# Altium PCB LineSensor32.PcbDoc (part 2 of 2)
Units mm, origin at the board's own origin, x right, y up, seen from the top; angles counter-clockwise.
Board outline 121.58 x 114.54 mm, 2 copper layers (Top Layer, Bottom Layer); 201 components, 111 nets, 642 pads, 221 vias.
Unrouted connection lines stored in the file: 4.
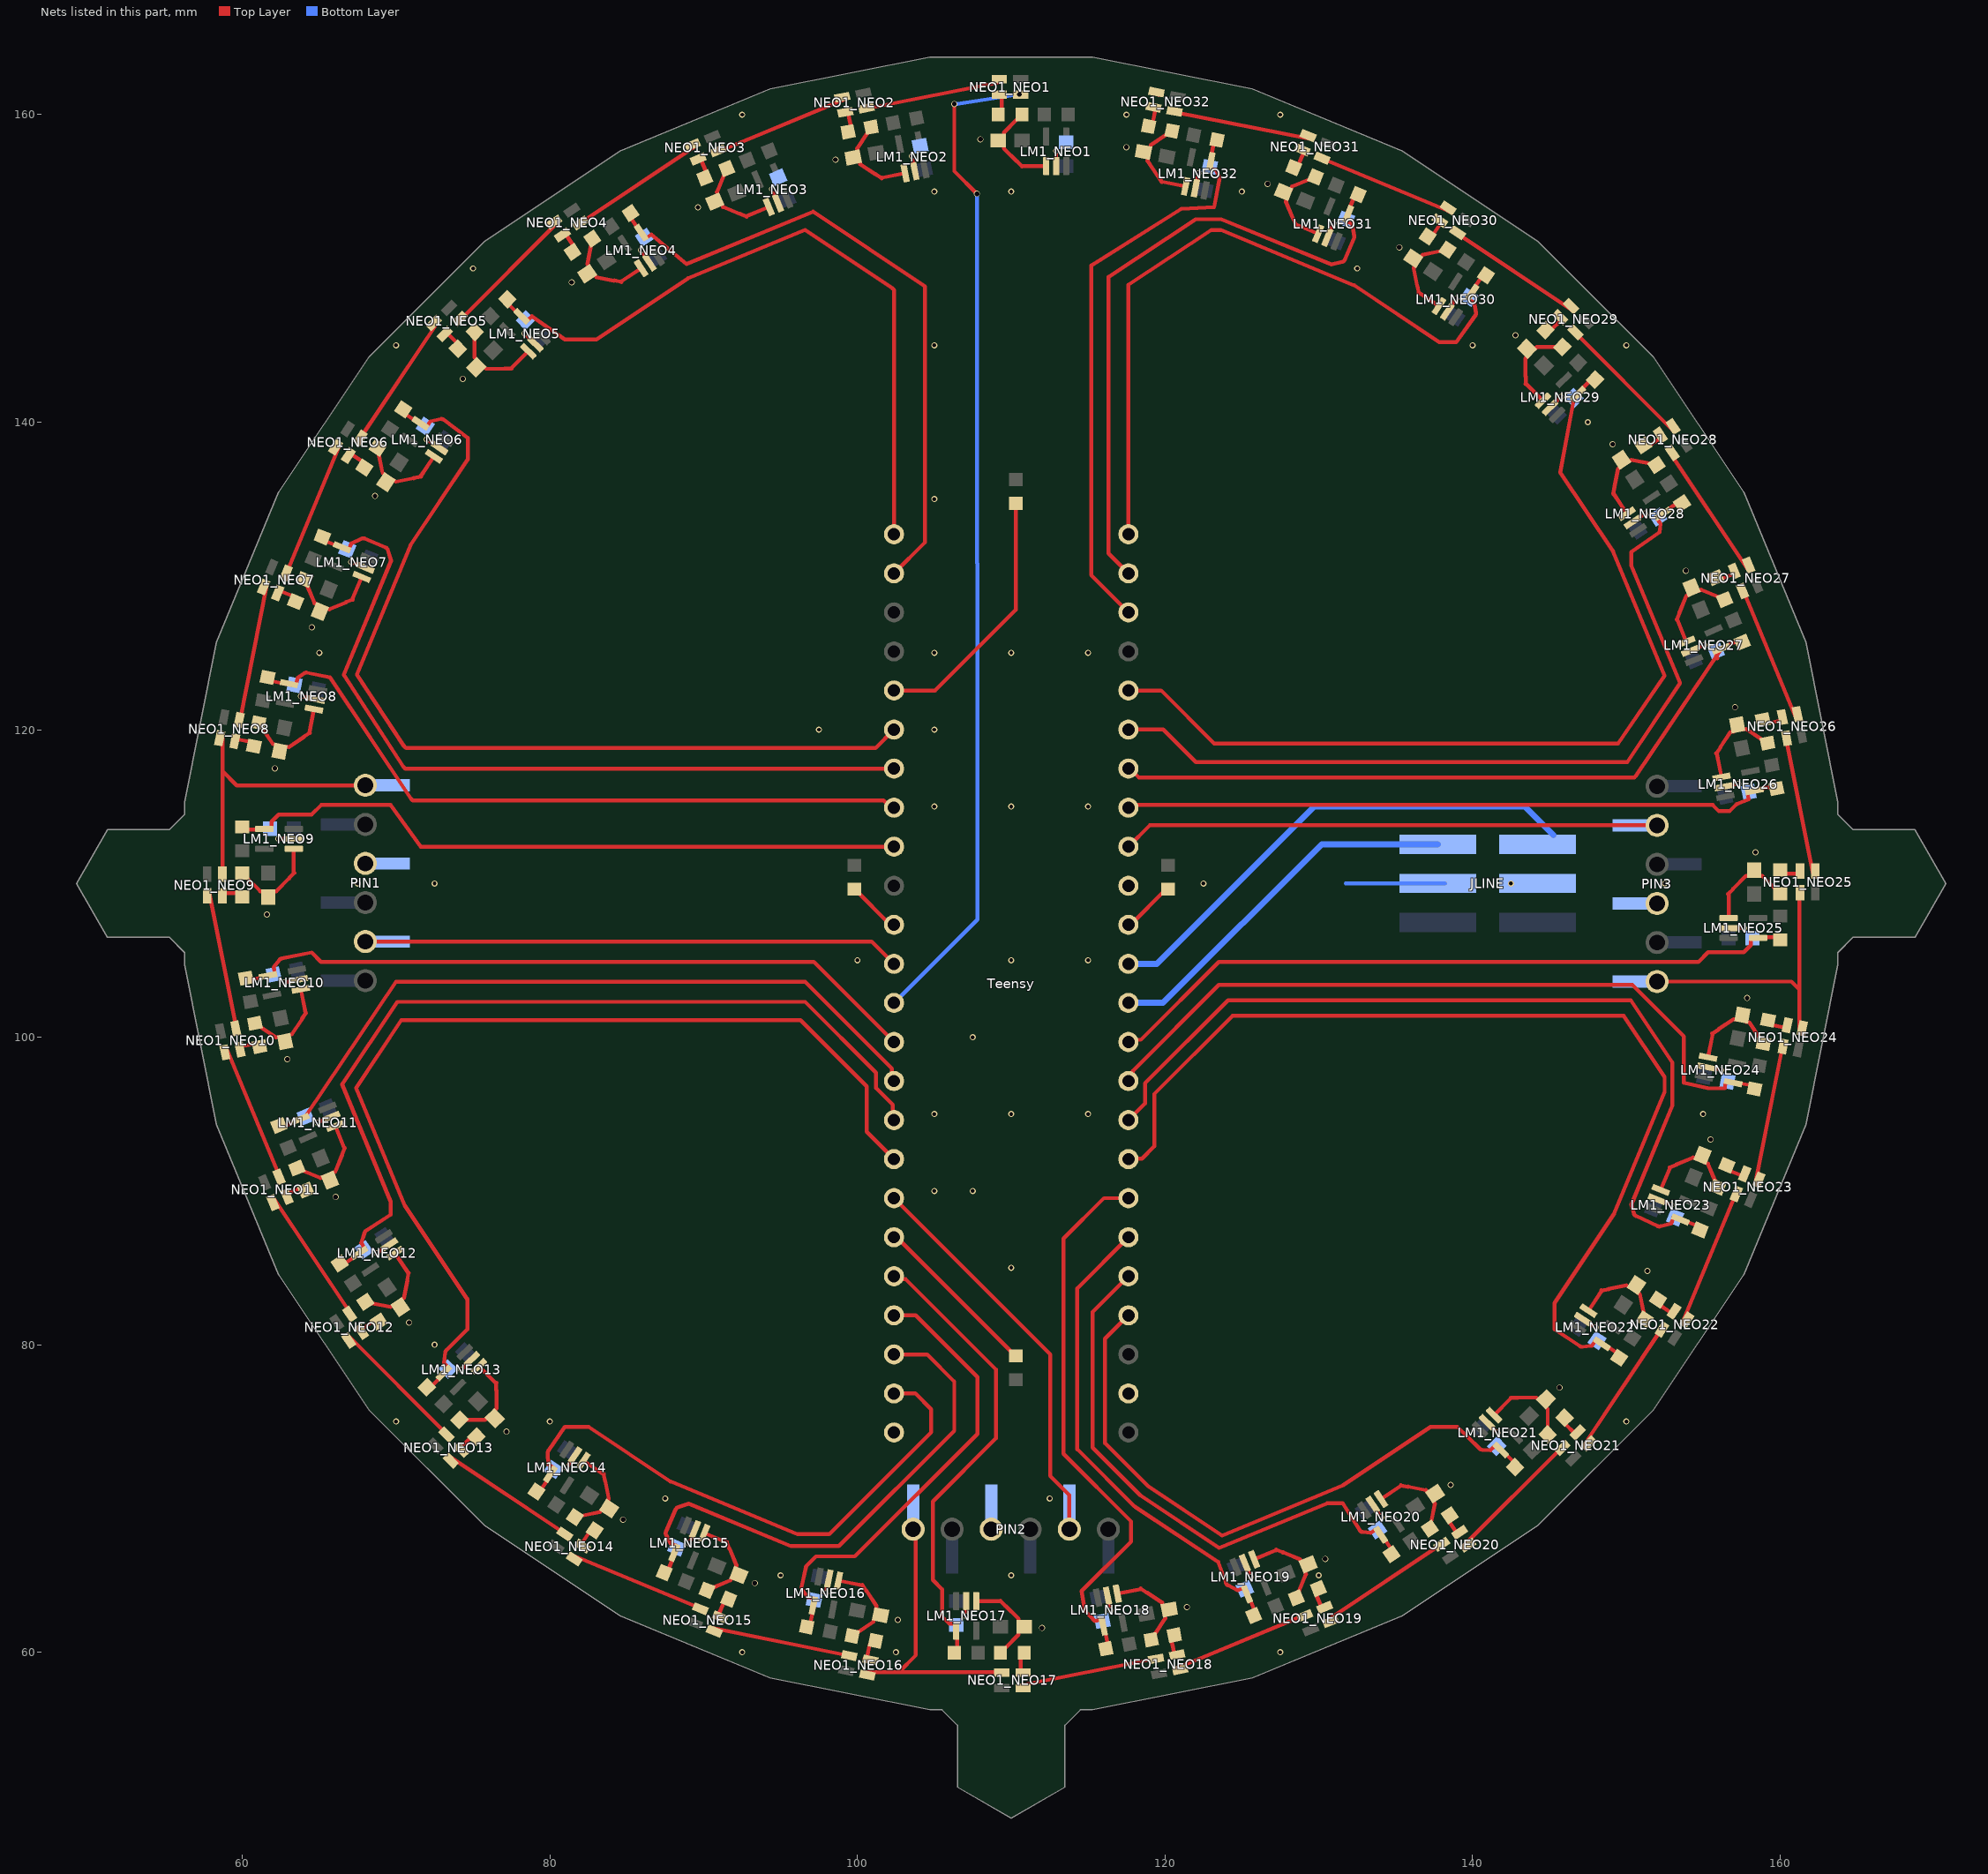
[diagram p2: the nets of this part, all layers, seen from the top]

## Via types
v1: diameter 0.4, hole 0.3, Top Layer to Bottom Layer, tented both sides, 167 vias
v2: diameter 0.4, hole 0.254, Top Layer to Bottom Layer, tented both sides, 51 vias
v3: diameter 6, hole 3, Top Layer to Bottom Layer, 3 vias

## Nets (pads, with @x,y where several pads share a name; then routed paths per layer and width w, separated by ;. In a path a pad name is that pad's centre, name@x,y a point inside that pad or via, vN(x,y) a via of type N, cw(c..) or ccw(c..) an arc to the next point about the centre after c; other vN are vias at no path point) (continued)
COMP4: LM1_NEO4.4 R2_NEO4.1 Teensy.31 | length 42.6
  Top Layer w0.254: R2_NEO4.1@85.251,153.6 85.203,153.357 85.878,152.347 86.098,152.019 86.268,151.985 86.597,152.204 88.895,150.29 97.117,153.695 104.4,148.829 104.4,132.19 Teensy.31@102.38,130.17
COMP5: LM1_NEO5.4 R2_NEO5.1 Teensy.32 | length 45.4
  Top Layer w0.254: R2_NEO5.1@77.229,147.997 77.229,147.75 78.088,146.891 78.368,146.611 78.542,146.611 78.821,146.891 80.988,145.37 83.011,145.37 88.983,149.36 96.588,152.511 102.267,148.716 102.38,148.603 Teensy.32@102.38,132.71
COMP6: LM1_NEO6.4 R2_NEO6.1 Teensy.27 | length 60.5
  Top Layer w0.254: R2_NEO6.1@70.455,140.833 70.503,140.59 71.514,139.915 71.842,139.695 72.013,139.729 72.232,140.058 72.887,140.2 cw(c72.941,139.952) 73.092,140.156 74.654,138.988 74.654,137.568 70.942,132.012 67.447,123.576 70.525,118.914 ; 70.525,118.913 ccw(c70.737,119.054) 70.737,118.8 101.17,118.8 Teensy.27@102.38,120.01
COMP7: LM1_NEO7.4 R2_NEO7.1 Teensy.26 | length 52.9
  Top Layer w0.254: R2_NEO7.1@65.198,132.536 65.292,132.307 66.415,131.842 66.78,131.691 66.94,131.757 67.092,132.122 67.747,132.427 cw(c67.854,132.197) 67.954,132.431 69.317,131.846 cw(c69.217,131.613) 69.459,131.689 ; 69.46,131.688 69.676,130.988 66.598,123.556 70.481,117.586 70.597,117.47 70.694,117.47 Teensy.26@102.38,117.47
COMP8: LM1_NEO8.4 R2_NEO8.1 Teensy.25 | length 45.8
  Top Layer w0.254: R2_NEO8.1@61.642,123.391 61.78,123.186 62.971,122.949 63.359,122.872 63.504,122.968 63.581,123.356 64.01,123.661 cw(c64.157,123.454) 64.207,123.703 65.697,123.4 70.962,115.513 71.075,115.4 71.173,115.4 101.704,115.4 102.174,114.93 Teensy.25@102.38,114.93
COMP9: LM1_NEO9.4 R2_NEO9.1 Teensy.24 | length 44.7
  Top Layer w0.254: R2_NEO9.1@59.984,113.675 60.159,113.5 61.374,113.5 61.769,113.5 61.892,113.623 61.892,114.018 62.349,114.475 64.5,114.475 65.125,115.1 69.64,115.1 71.6,112.39 Teensy.24@102.38,112.39
COMP10: LM1_NEO10.4 R2_NEO10.1 Teensy.9 | length 45.5
  Top Layer w0.254: R2_NEO10.1@60.228,103.847 60.434,103.709 61.626,103.946 62.013,104.023 62.11,104.168 62.032,104.556 62.418,105.029 cw(c62.615,104.869) 62.563,105.118 64.501,105.512 65.114,104.9 97.17,104.9 Teensy.9@102.38,99.69
COMP11: LM1_NEO11.4 R2_NEO11.1 Teensy.8 | length 47.9
  Top Layer w0.254: R2_NEO11.1@62.385,94.255 62.614,94.16 63.736,94.625 64.101,94.776 64.168,94.937 69.984,103.6 96.6,103.6 102.237,97.963 102.237,97.293 Teensy.8@102.38,97.15
COMP12: LM1_NEO12.4 R2_NEO12.1 Teensy.7 | length 57.4
  Top Layer w0.254: R2_NEO12.1@66.337,85.275 66.58,85.227 67.59,85.902 67.918,86.121 67.952,86.292 67.733,86.621 67.947,87.288 cw(c68.189,87.211) 68.052,87.424 69.647,88.449 69.647,89.306 66.486,96.937 70.07,102.3 96.6,102.3 101.2,97.7 101.2,96.7 102.307,95.593 102.307,94.683 Teensy.7@102.38,94.61
COMP13: LM1_NEO13.4 R2_NEO13.1 Teensy.6 | length 65.6
  Top Layer w0.254: R2_NEO13.1@71.999,77.232 72.247,77.232 73.106,78.091 73.385,78.37 73.385,78.544 73.106,78.824 73.189,79.488 cw(c73.441,79.456) 73.262,79.637 74.627,80.991 74.627,82.965 70.548,89.069 67.392,96.69 70.339,101.1 96.3,101.1 100.6,96.8 100.6,93.85 Teensy.6@102.38,92.07
COMP14: LM1_NEO14.4 R2_NEO14.1 Teensy.0 | length 37.9
  Top Layer w0.254: R2_NEO14.1@79.122,70.448 79.365,70.496 80.04,71.507 80.259,71.835 80.226,72.006 79.897,72.225 79.855,72.938 cw(c80.109,72.953) 79.899,73.097 80.966,74.647 82.534,74.647 87.84,71.102 96.115,67.674 98.174,67.674 104.8,74.3 104.8,75.8 103.77,76.83 Teensy.0@102.38,76.83
COMP15: LM1_NEO15.4 R2_NEO15.1 Teensy.1 | length 34.6
  Top Layer w0.254: R2_NEO15.1@87.432,65.184 87.66,65.279 88.125,66.401 88.277,66.766 88.21,66.927 87.845,67.078 87.557,67.618 cw(c87.782,67.736) 87.549,67.837 88.18,69.295 cw(c88.413,69.194) 88.333,69.435 ; 88.333,69.436 89.021,69.662 95.69,66.9 98.8,66.9 106.3,74.4 106.3,77.6 104.53,79.37 Teensy.1@102.38,79.37
COMP16: LM1_NEO16.4 R2_NEO16.1 Teensy.2 | length 30.1
  Top Layer w0.254: 96.373,64.259 ccw(c96.622,64.207) 96.415,64.06 96.755,63.585 97.142,63.507 97.238,63.362 97.16,62.975 96.918,61.784 R2_NEO16.1@96.712,61.647 ; 96.373,64.259 96.634,65.501 cw(c96.883,65.449) 96.703,65.628 97.307,66.232 99.832,66.232 107.8,74.2 107.8,77.9 103.79,81.91 Teensy.2@102.38,81.91
COMP17: LM1_NEO17.4 R2_NEO17.1 Teensy.3 | length 30.2
  Top Layer w0.254: Teensy.3@102.38,84.45 102.573,84.257 103.143,84.257 109,78.4 109,73.9 104.9,69.8 104.9,64.7 105.5,64.1 105.5,62.324 105.957,61.867 106.352,61.867 106.475,61.744 106.475,61.349 106.475,60.134 R2_NEO17.1@106.3,59.959
COMP18: LM1_NEO18.4 R2_NEO18.1 Teensy.20 | length 36
  Top Layer w0.254: 114.787,62.776 ccw(c115.037,62.82) 114.853,62.645 115.444,62.032 115.832,62.11 115.977,62.013 116.054,61.626 116.291,60.434 R2_NEO18.1@116.153,60.228 ; 114.787,62.777 114.578,63.978 117.8,67.2 117.8,68.5 113.4,72.9 113.4,86.9 116.03,89.53 Teensy.20@117.62,89.53
COMP19: LM1_NEO19.4 R2_NEO19.1 Teensy.21 | length 31.8
  Top Layer w0.254: Teensy.21@117.62,86.99 114.3,83.67 114.3,73.2 118.022,69.478 118.062,69.446 123.459,65.878 123.966,64.493 ; 123.966,64.492 ccw(c124.205,64.58) 124.087,64.355 124.721,64.026 125.086,64.177 125.247,64.111 125.398,63.746 125.863,62.623 R2_NEO19.1@125.768,62.394
COMP20: LM1_NEO20.4 R2_NEO20.1 Teensy.22 | length 36.5
  Top Layer w0.254: Teensy.22@117.62,84.45 115.3,82.13 115.3,73.3 118.389,70.211 123.519,66.783 130.544,69.682 131.558,69.682 132.658,67.932 ; 132.658,67.931 ccw(c132.873,68.067) 132.85,67.814 133.386,67.767 133.715,67.987 133.886,67.953 134.105,67.624 134.78,66.614 R2_NEO20.1@134.732,66.372
COMP21: LM1_NEO21.4 R2_NEO21.1 Teensy.23 | length 41
  Top Layer w0.254: Teensy.23@117.62,81.91 116.1,80.39 116.1,73.6 118.875,70.825 118.914,70.793 123.706,67.591 131.581,70.853 137.282,74.662 139.009,74.662 140.456,73.242 ccw(c140.634,73.424) 140.621,73.17 141.176,73.141 141.456,73.421 141.63,73.421 141.909,73.141 142.768,72.282 R2_NEO21.1@142.768,72.035
COMP22: LM1_NEO22.4 R2_NEO22.1 Teensy.19 | length 66.3
  Top Layer w0.254: Teensy.19@117.62,92.07 117.656,92.106 118.506,92.106 119.3,92.9 119.3,96.3 124.4,101.4 149.83,101.4 152.492,97.415 152.492,96.44 149.201,88.496 145.346,82.726 145.346,81.001 146.997,79.902 ; 146.998,79.901 ccw(c147.138,80.113) 147.168,79.861 147.768,79.932 147.988,80.26 148.158,80.294 148.487,80.075 149.497,79.4 R2_NEO22.1@149.545,79.157
COMP23: LM1_NEO23.4 R2_NEO23.1 Teensy.18 | length 57
  Top Layer w0.254: Teensy.18@117.62,94.61 118.7,95.69 118.7,97 124.1,102.4 150.296,102.4 153,98.353 153,95.573 150.324,89.112 150.493,88.534 ccw(c150.737,88.606) 150.628,88.377 152.043,87.713 ccw(c152.15,87.944) 152.213,87.698 ; 152.214,87.698 152.908,87.878 153.06,88.243 153.22,88.309 153.585,88.158 154.708,87.693 R2_NEO23.1@154.802,87.464
COMP24: LM1_NEO24.4 R2_NEO24.1 Teensy.17 | length 48.5
  Top Layer w0.254: Teensy.17@117.62,97.15 117.62,97.435 117.913,97.728 117.913,97.813 123.5,103.4 150.4,103.4 153.753,100.047 153.753,97.025 155.298,96.699 156.4,96.674 156.477,97.061 156.621,97.158 157.009,97.081 158.201,96.844 R2_NEO24.1@158.338,96.638
COMP25: LM1_NEO25.4 R2_NEO25.1 Teensy.16 | length 45.5
  Top Layer w0.254: Teensy.16@117.62,99.69 117.763,99.833 118.433,99.833 123.5,104.9 154.7,104.9 155.325,105.525 157.651,105.525 158.108,105.982 158.108,106.377 158.231,106.5 158.626,106.5 159.841,106.5 R2_NEO25.1@160.016,106.325
COMP26: LM1_NEO26.4 R2_NEO26.1 Teensy.40 | length 43.3
  Top Layer w0.254: Teensy.40@117.62,114.93 117.79,115.1 155.624,115.1 156.024,114.7 156.716,114.7 157.138,115.122 157.175,115.159 157.225,115.178 157.963,115.469 157.886,115.857 157.982,116.001 158.37,116.078 159.561,116.315 R2_NEO26.1@159.767,116.178
COMP27: LM1_NEO27.4 R2_NEO27.1 Teensy.39 | length 45.7
  Top Layer w0.254: Teensy.39@117.62,117.47 117.726,117.47 118.296,116.9 150.42,116.9 150.518,116.9 150.631,117.012 LM1_NEO27.4@156.177,125.258 ; 155.924,124.646 155.773,125.011 155.839,125.172 156.204,125.323 157.327,125.788 R2_NEO27.1@157.555,125.693
COMP28: LM1_NEO28.4 R2_NEO28.1 Teensy.38 | length 53.9
  Top Layer w0.254: Teensy.38@117.62,120.01 119.89,120.01 122,117.9 150.062,117.9 153.494,123.037 150.318,130.705 150.318,131.558 152.17,132.835 152.233,133.386 152.013,133.715 152.047,133.886 152.376,134.105 153.386,134.78 R2_NEO28.1@153.629,134.732
COMP29: LM1_NEO29.4 R2_NEO29.1 Teensy.37 | length 60.4
  Top Layer w0.254: Teensy.37@117.62,122.55 119.75,122.55 123.2,119.1 149.463,119.1 152.489,123.515 149.141,131.599 145.7,136.749 146.579,141.456 146.579,141.63 146.859,141.909 147.718,142.768 R2_NEO29.1@147.965,142.768
COMP30: LM1_NEO30.4 R2_NEO30.1 Teensy.33 | length 45.9
  Top Layer w0.254: Teensy.33@117.62,132.71 117.62,148.934 123.016,152.5 123.62,152.5 132.301,148.904 137.845,145.2 138.932,145.2 140.185,146.936 ccw(c139.98,147.084) 140.229,147.132 ; 140.229,147.133 140.103,147.775 139.774,147.994 139.741,148.165 139.96,148.493 140.635,149.504 R2_NEO30.1@140.878,149.552
COMP31: LM1_NEO31.4 R2_NEO31.1 Teensy.34 | length 41.9
  Top Layer w0.254: Teensy.34@117.62,130.17 116.329,131.461 116.329,149.447 122.008,153.2 123.649,153.2 130.825,150.261 131.523,150.421 ccw(c131.467,150.669) 131.7,150.569 ; 131.701,150.57 132.295,151.979 ccw(c132.061,152.077) 132.31,152.125 132.155,152.922 131.79,153.073 131.723,153.234 131.875,153.599 132.34,154.721 R2_NEO31.1@132.568,154.816
COMP32: LM1_NEO32.4 R2_NEO32.1 Teensy.35 | length 37.5
  Top Layer w0.254: Teensy.35@117.62,127.63 115.2,130.05 115.2,150.191 121.072,153.872 123.197,153.983 123.563,155.88 ; R2_NEO32.1@123.391,158.358 123.186,158.22 122.949,157.029 122.872,156.641 122.968,156.496 123.312,156.428 123.563,155.877
DIN1: NEO1_NEO1.DIN Teensy.10 | length 65.4
  Top Layer w0.254: v1(106.3,160.7) 106.3,156.325 v1(107.775,154.85)
  Bottom Layer w0.254: Teensy.10@102.38,102.23 107.8,107.65 107.8,130.806 107.775,130.831 v1(107.775,154.85) ; 106.5,160.7 v1(110.525,161.316)
DIN2: NEO1_NEO1.DOUT NEO1_NEO2.DIN | length 9.3
  Top Layer w0.254: NEO1_NEO2.DIN@100.479,160.428 100.636,160.399 109.402,162.143 NEO1_NEO1.DOUT@109.55,162.291
DIN3: NEO1_NEO2.DOUT NEO1_NEO3.DIN | length 9.1
  Top Layer w0.254: NEO1_NEO3.DIN@91.004,157.618 99.216,161.02 NEO1_NEO2.DOUT@99.332,161.194
DIN4: NEO1_NEO3.DOUT NEO1_NEO4.DIN | length 9.2
  Top Layer w0.254: NEO1_NEO4.DIN@82.023,152.983 89.484,157.968 NEO1_NEO3.DOUT@89.564,158.161
DIN5: NEO1_NEO4.DOUT NEO1_NEO5.DIN | length 9.1
  Top Layer w0.254: NEO1_NEO5.DIN@74.231,146.715 80.496,152.981 NEO1_NEO4.DOUT@80.537,153.186
DIN6: NEO1_NEO5.DOUT NEO1_NEO6.DIN | length 9.2
  Top Layer w0.254: NEO1_NEO6.DIN@67.714,139.024 72.686,146.462 NEO1_NEO5.DOUT@72.686,146.671
DIN7: NEO1_NEO6.DOUT NEO1_NEO7.DIN | length 9.1
  Top Layer w0.254: NEO1_NEO7.DIN@62.891,130.215 66.298,138.442 NEO1_NEO6.DOUT@66.258,138.647
DIN8: NEO1_NEO7.DOUT NEO1_NEO8.DIN | length 9.1
  Top Layer w0.254: NEO1_NEO8.DIN@59.854,120.661 61.588,129.379 NEO1_NEO7.DOUT@61.508,129.572
DIN9: NEO1_NEO8.DOUT NEO1_NEO9.DIN PIN1.1 | length 18.8
  Top Layer w0.254: NEO1_NEO8.DOUT@58.601,119.765 58.718,119.591 58.718,117.3 ; NEO1_NEO9.DIN@58.718,110.648 58.718,117.3 ; PIN1.1@68,116.38 59.638,116.38 58.718,117.3
DIN10: NEO1_NEO9.DOUT NEO1_NEO10.DIN | length 9.1
  Top Layer w0.254: NEO1_NEO9.DOUT@57.709,109.525 57.857,109.377 NEO1_NEO10.DIN@59.596,100.635
DIN11: NEO1_NEO10.DOUT NEO1_NEO11.DIN | length 9.1
  Top Layer w0.254: NEO1_NEO10.DOUT@58.806,99.333 58.98,99.216 NEO1_NEO11.DIN@62.391,90.981
DIN12: NEO1_NEO11.DOUT NEO1_NEO12.DIN | length 9.1
  Top Layer w0.254: NEO1_NEO11.DOUT@61.871,89.55 62.065,89.47 NEO1_NEO12.DIN@67.003,82.08
DIN13: NEO1_NEO12.DOUT NEO1_NEO13.DIN | length 9.1
  Top Layer w0.254: NEO1_NEO12.DOUT@66.751,80.561 66.956,80.52 NEO1_NEO13.DIN@73.262,74.214
DIN14: NEO1_NEO13.DOUT NEO1_NEO14.DIN | length 9.1
  Top Layer w0.254: NEO1_NEO13.DOUT@73.325,72.689 73.535,72.689 NEO1_NEO14.DIN@80.95,67.734
DIN15: NEO1_NEO14.DOUT NEO1_NEO15.DIN | length 9.1
  Top Layer w0.254: NEO1_NEO14.DOUT@81.309,66.251 81.514,66.292 NEO1_NEO15.DIN@89.753,62.879
DIN16: NEO1_NEO15.DOUT NEO1_NEO16.DIN | length 9.2
  Top Layer w0.254: NEO1_NEO15.DOUT@90.395,61.494 90.589,61.574 NEO1_NEO16.DIN@99.421,59.78
DIN17: NEO1_NEO16.DOUT NEO1_NEO17.DIN PIN2.1 | length 18.9
  Top Layer w0.254: NEO1_NEO16.DOUT@100.326,58.592 100.5,58.707 102.7,58.707 ; PIN2.1@103.62,68 103.8,67.82 103.8,59.807 102.7,58.707 ; NEO1_NEO17.DIN@109.327,58.707 102.7,58.707
DIN18: NEO1_NEO17.DOUT NEO1_NEO18.DIN | length 9.2
  Top Layer w0.254: NEO1_NEO17.DOUT@110.45,57.684 110.598,57.832 NEO1_NEO18.DIN@119.369,59.577
DIN19: NEO1_NEO18.DOUT NEO1_NEO19.DIN | length 9.1
  Top Layer w0.254: NEO1_NEO18.DOUT@120.667,58.806 120.784,58.98 NEO1_NEO19.DIN@129.042,62.401
DIN20: NEO1_NEO19.DOUT NEO1_NEO20.DIN | length 9.1
  Top Layer w0.254: NEO1_NEO19.DOUT@130.473,61.881 130.553,62.074 NEO1_NEO20.DIN@137.944,67.013
DIN21: NEO1_NEO20.DOUT NEO1_NEO21.DIN | length 9.1
  Top Layer w0.254: NEO1_NEO20.DOUT@139.446,66.786 139.487,66.991 NEO1_NEO21.DIN@145.79,73.294
DIN22: NEO1_NEO21.DOUT NEO1_NEO22.DIN | length 9.1
  Top Layer w0.254: NEO1_NEO21.DOUT@147.311,73.361 147.311,73.57 NEO1_NEO22.DIN@152.263,80.981
DIN23: NEO1_NEO22.DOUT NEO1_NEO23.DIN | length 9.1
  Top Layer w0.254: NEO1_NEO22.DOUT@153.742,81.344 153.701,81.549 NEO1_NEO23.DIN@157.113,89.784
DIN24: NEO1_NEO23.DOUT NEO1_NEO24.DIN | length 9.1
  Top Layer w0.254: NEO1_NEO23.DOUT@158.492,90.428 158.412,90.621 NEO1_NEO24.DIN@160.151,99.364
DIN25: NEO1_NEO24.DOUT NEO1_NEO25.DIN PIN3.1 | length 18.6
  Top Layer w0.254: PIN3.1@152,103.62 160.743,103.62 161.263,103.1 ; NEO1_NEO25.DIN@161.263,109.352 161.263,103.1 ; NEO1_NEO24.DOUT@161.379,100.264 161.263,100.438 161.263,103.1
DIN26: NEO1_NEO25.DOUT NEO1_NEO26.DIN | length 9.1
  Top Layer w0.254: NEO1_NEO26.DIN@160.399,119.39 162.143,110.623 NEO1_NEO25.DOUT@162.291,110.475
DIN27: NEO1_NEO26.DOUT NEO1_NEO27.DIN | length 9.1
  Top Layer w0.254: NEO1_NEO27.DIN@157.623,128.997 161.015,120.808 NEO1_NEO26.DOUT@161.189,120.692
DIN28: NEO1_NEO27.DOUT NEO1_NEO28.DIN | length 9.1
  Top Layer w0.254: NEO1_NEO28.DIN@152.918,137.898 157.876,130.478 NEO1_NEO27.DOUT@158.069,130.398
DIN29: NEO1_NEO28.DOUT NEO1_NEO29.DIN | length 9.1
  Top Layer w0.254: NEO1_NEO29.DIN@146.706,145.79 153.009,139.487 NEO1_NEO28.DOUT@153.214,139.446
DIN30: NEO1_NEO29.DOUT NEO1_NEO30.DIN | length 9.1
  Top Layer w0.254: NEO1_NEO30.DIN@139.04,152.249 146.43,147.311 NEO1_NEO29.DOUT@146.639,147.311
DIN31: NEO1_NEO30.DOUT NEO1_NEO31.DIN | length 9.1
  Top Layer w0.254: NEO1_NEO31.DIN@130.247,157.121 138.486,153.708 NEO1_NEO30.DOUT@138.691,153.749
DIN32: NEO1_NEO31.DOUT NEO1_NEO32.DIN | length 9.1
  Top Layer w0.254: NEO1_NEO32.DIN@120.665,160.166 129.411,158.426 NEO1_NEO31.DOUT@129.605,158.506
DOUT32: NEO1_NEO32.DOUT | length 0.2
  Top Layer w0.254: NEO1_NEO32.DOUT@119.591,161.282 NEO1_NEO32.DOUT@119.765,161.399
GND: C2_NEO1.1 C2_NEO2.1 C2_NEO3.1 C2_NEO4.1 C2_NEO5.1 C2_NEO6.1 C2_NEO7.1 C2_NEO8.1 C2_NEO9.1 C2_NEO10.1 C2_NEO11.1 C2_NEO12.1 C2_NEO13.1 C2_NEO14.1 C2_NEO15.1 C2_NEO16.1 C2_NEO17.1 C2_NEO18.1 C2_NEO19.1 C2_NEO20.1 C2_NEO21.1 C2_NEO22.1 C2_NEO23.1 C2_NEO24.1 C2_NEO25.1 C2_NEO26.1 C2_NEO27.1 C2_NEO28.1 C2_NEO29.1 C2_NEO30.1 C2_NEO31.1 C2_NEO32.1 JLINE.2 JLINE.5 LM1_NEO1.2 LM1_NEO2.2 LM1_NEO3.2 LM1_NEO4.2 LM1_NEO5.2 LM1_NEO6.2 LM1_NEO7.2 LM1_NEO8.2 LM1_NEO9.2 LM1_NEO10.2 LM1_NEO11.2 LM1_NEO12.2 LM1_NEO13.2 LM1_NEO14.2 LM1_NEO15.2 LM1_NEO16.2 LM1_NEO17.2 LM1_NEO18.2 LM1_NEO19.2 LM1_NEO20.2 LM1_NEO21.2 LM1_NEO22.2 LM1_NEO23.2 LM1_NEO24.2 LM1_NEO25.2 LM1_NEO26.2 LM1_NEO27.2 LM1_NEO28.2 LM1_NEO29.2 LM1_NEO30.2 LM1_NEO31.2 LM1_NEO32.2 NEO1_NEO1.GND NEO1_NEO2.GND NEO1_NEO3.GND NEO1_NEO4.GND NEO1_NEO5.GND NEO1_NEO6.GND NEO1_NEO7.GND NEO1_NEO8.GND NEO1_NEO9.GND NEO1_NEO10.GND NEO1_NEO11.GND NEO1_NEO12.GND NEO1_NEO13.GND NEO1_NEO14.GND NEO1_NEO15.GND NEO1_NEO16.GND NEO1_NEO17.GND NEO1_NEO18.GND NEO1_NEO19.GND NEO1_NEO20.GND NEO1_NEO21.GND NEO1_NEO22.GND NEO1_NEO23.GND NEO1_NEO24.GND NEO1_NEO25.GND NEO1_NEO26.GND NEO1_NEO27.GND NEO1_NEO28.GND NEO1_NEO29.GND NEO1_NEO30.GND NEO1_NEO31.GND NEO1_NEO32.GND PIN1.3 PIN2.3 PIN3.3 R1_NEO1.1 R1_NEO2.1 R1_NEO3.1 R1_NEO4.1 R1_NEO5.1 R1_NEO6.1 R1_NEO7.1 R1_NEO8.1 R1_NEO9.1 R1_NEO10.1 R1_NEO11.1 R1_NEO12.1 R1_NEO13.1 R1_NEO14.1 R1_NEO15.1 R1_NEO16.1 R1_NEO17.1 R1_NEO18.1 R1_NEO19.1 R1_NEO20.1 R1_NEO21.1 R1_NEO22.1 R1_NEO23.1 R1_NEO24.1 R1_NEO25.1 R1_NEO26.1 R1_NEO27.1 R1_NEO28.1 R1_NEO29.1 R1_NEO30.1 R1_NEO31.1 R1_NEO32.1 Teensy.GND Teensy.GND1 Teensy.GND3 | length 84.1
  Top Layer w0.254: NEO1_NEO9.GND@58.684,109.525 58.832,109.377 59.661,109.377 R1_NEO9.1@59.984,109.15 ; NEO1_NEO8.GND@59.577,119.545 59.694,119.371 60.507,119.21 R1_NEO8.1@60.779,118.924 ; NEO1_NEO10.GND@59.763,99.523 59.937,99.407 60.75,99.568 R1_NEO10.1@61.111,99.409 ; v1(62.35,112.9) LM1_NEO9.2@63.344,112.9 ; NEO1_NEO7.GND@62.408,129.199 62.489,129.006 63.254,128.688 R1_NEO7.1@63.466,128.355 ; v1(62.7,103.548) LM1_NEO10.2@63.675,103.742 ; NEO1_NEO11.GND@62.772,89.923 62.965,89.843 63.731,90.161 R1_NEO11.1@64.117,90.074 ; v1(63.812,122.17) LM1_NEO8.2@64.787,121.976 ; v1(64.867,94.444) LM1_NEO11.2@65.786,94.825 ; NEO1_NEO6.GND@67.068,138.115 67.109,137.909 67.799,137.449 R1_NEO6.1@67.941,137.081 ; v1(67.087,130.914) LM1_NEO7.2@68.005,130.534 ; NEO1_NEO12.GND@67.596,81.095 67.801,81.055 68.491,81.515 R1_NEO12.1@68.885,81.506 ; v1(68.735,85.945) LM1_NEO12.2@69.561,86.497 ; v1(71.992,138.874) LM1_NEO6.2@72.818,138.321 ; NEO1_NEO5.GND@73.378,145.95 73.378,145.741 73.964,145.155 R1_NEO5.1@74.032,144.766 ; NEO1_NEO13.GND@74.05,73.378 74.259,73.378 74.845,73.964 R1_NEO13.1@75.234,74.032 ; v1(74.22,78.357) LM1_NEO13.2@74.923,79.06 ; v1(78.354,145.776) LM1_NEO5.2@79.057,145.073 ; v1(81.081,71.985) LM1_NEO14.2@81.633,72.811 ; NEO1_NEO4.GND@81.095,152.404 81.055,152.199 81.515,151.509 R1_NEO4.1@81.506,151.115 ; NEO1_NEO14.GND@81.885,67.068 82.091,67.109 82.551,67.799 R1_NEO14.1@82.919,67.941 ; v1(85.922,151.202) LM1_NEO4.2@86.474,150.376 ; v1(89.053,67.073) LM1_NEO15.2@89.434,67.992 ; NEO1_NEO3.GND@89.923,157.228 89.843,157.035 90.161,156.269 R1_NEO3.1@90.074,155.883 ; NEO1_NEO15.GND@90.801,62.408 90.994,62.489 91.312,63.254 R1_NEO15.1@91.645,63.466 ; v1(94.458,155.165) LM1_NEO3.2@94.838,154.247 ; v1(97.942,63.812) LM1_NEO16.2@98.14,64.786 ; R1_NEO2.1@99.409,158.889 99.568,159.25 99.407,160.063 NEO1_NEO2.GND@99.523,160.237 ; NEO1_NEO16.GND@100.455,59.577 100.629,59.694 100.79,60.507 R1_NEO16.1@101.076,60.779 ; v1(103.548,157.301) LM1_NEO2.2@103.742,156.326 ; v1(107.075,62.325) LM1_NEO17.2@107.075,63.319 ; R1_NEO1.1@109.15,160.016 109.377,160.339 109.377,161.168 NEO1_NEO1.GND@109.525,161.316 ; NEO1_NEO17.GND@110.475,58.684 110.623,58.832 110.623,59.661 R1_NEO17.1@110.85,59.984 ; LM1_NEO1.2@112.925,156.656 v1(112.925,157.65) ; LM1_NEO18.2@116.258,63.675 v1(116.452,62.7) ; R1_NEO32.1@118.924,159.221 119.21,159.493 119.371,160.306 NEO1_NEO32.GND@119.545,160.423 ; NEO1_NEO18.GND@120.477,59.763 120.593,59.937 120.432,60.75 R1_NEO18.1@120.591,61.111 ; LM1_NEO32.2@121.976,155.213 v1(122.17,156.188) ; LM1_NEO19.2@125.198,65.795 v1(125.579,64.877) ; R1_NEO31.1@128.355,156.534 128.688,156.746 129.006,157.511 NEO1_NEO31.GND@129.199,157.592 ; R1_NEO19.1@129.926,64.117 129.839,63.731 130.157,62.965 NEO1_NEO19.GND@130.077,62.772 ; LM1_NEO31.2@130.566,152.008 v1(130.947,152.927) ; LM1_NEO20.2@133.509,69.596 v1(134.062,68.769) ; R1_NEO30.1@137.081,152.059 137.449,152.201 137.909,152.891 NEO1_NEO30.GND@138.115,152.932 ; LM1_NEO30.2@138.367,147.189 v1(138.919,148.015) ; R1_NEO20.1@138.494,68.885 138.485,68.491 138.945,67.801 NEO1_NEO20.GND@138.905,67.596 ; LM1_NEO21.2@140.94,74.959 v1(141.643,74.256) ; R1_NEO29.1@144.766,145.968 145.155,146.036 145.741,146.622 NEO1_NEO29.GND@145.95,146.622 ; LM1_NEO29.2@145.041,140.94 v1(145.744,141.643) ; R1_NEO21.1@145.968,75.234 146.036,74.845 146.622,74.259 NEO1_NEO21.GND@146.622,74.05 ; LM1_NEO22.2@147.182,81.668 v1(148.008,81.116) ; LM1_NEO28.2@150.404,133.509 v1(151.231,134.062) ; R1_NEO28.1@151.115,138.494 151.509,138.485 152.199,138.945 NEO1_NEO28.GND@152.404,138.905 ; LM1_NEO23.2@151.995,89.466 v1(152.913,89.086) ; R1_NEO22.1@152.059,82.919 152.201,82.551 152.891,82.091 NEO1_NEO22.GND@152.932,81.885 ; LM1_NEO27.2@154.155,125.123 v1(155.073,125.504) ; LM1_NEO24.2@155.194,98.054 v1(156.169,97.86) ; R1_NEO27.1@155.883,129.926 156.269,129.839 157.035,130.157 NEO1_NEO27.GND@157.228,130.077 ; LM1_NEO26.2@156.32,116.282 v1(157.295,116.476) ; R1_NEO23.1@156.534,91.645 156.746,91.312 157.511,90.994 NEO1_NEO23.GND@157.592,90.801 ; LM1_NEO25.2@156.656,107.1 v1(157.65,107.1) ; R1_NEO26.1@158.889,120.591 159.25,120.432 160.063,120.593 NEO1_NEO26.GND@160.237,120.477 ; R1_NEO24.1@159.221,101.076 159.493,100.79 160.306,100.629 NEO1_NEO24.GND@160.423,100.455 ; R1_NEO25.1@160.016,110.85 160.339,110.623 161.168,110.623 NEO1_NEO25.GND@161.316,110.475
  Bottom Layer w0.254: 131.75,110 JLINE.5@138.225,110
  other v1: 112,61.575 102.619,62.096 121.428,62.925 93.316,64.496 130.416,66.069 84.759,68.625 138.573,70.882 77.173,74.344 145.656,77.208 70.847,81.434 151.368,84.794 66.059,89.607 155.491,93.349 62.925,98.572 157.865,102.544 61.6,107.975 158.4,112.025 62.115,117.486 157.07,121.453 64.509,126.651 153.881,130.341 68.631,135.196 149.118,138.573 74.341,142.824 142.792,145.656 81.41,149.09 135.241,151.375 89.621,153.973 126.684,155.504 98.571,157.075 117.486,157.885 108,158.4
  other v2: 92.5,60 102.5,60 127.5,60 95,65 110,65 130,65 87.5,70 112.5,70 70,75 80,75 150,75 72.5,80 110,85 105,90 107.5,90 105,95 110,95 115,95 155,95 107.5,100 100,105 110,105 115,105 67.5,110 72.5,110 122.5,110 142.5,110 152.5,110 105,115 110,115 115,115 97.5,120 105,120 65,125 105,125 110,125 115,125 105,135 147.5,140 70,145 105,145 140,145 150,145 75,150 132.5,150 105,155 110,155 125,155 92.5,160 117.5,160 127.5,160
NetR-BOTTOM_2: R-BOTTOM.2 Teensy.4 | length 11.1
  Top Layer w0.254: Teensy.4@102.38,86.99 102.56,86.99 110.275,79.275 R-BOTTOM.2@110.3,79.275
NetR-LEFT_1: R-LEFT.1 Teensy.13 | length 3.4
  Top Layer w0.254: Teensy.13@117.62,107.31 117.76,107.31 120.075,109.625 R-LEFT.1@120.1,109.625
NetR-RIGHT_2: R-RIGHT.2 Teensy.12 | length 3.5
  Top Layer w0.254: R-RIGHT.2@99.8,109.625 99.825,109.625 102.14,107.31 Teensy.12@102.38,107.31
NetR-TOP_2: R-TOP.2 Teensy.28 | length 17
  Top Layer w0.254: Teensy.28@102.38,122.55 105.05,122.55 110.3,127.8 R-TOP.2@110.3,134.725
PD-1_NEO1: D1_NEO1.E LM1_NEO1.1 R1_NEO1.2 | length 6.3
  Top Layer w0.254: D1_NEO1.E@109.15,158.316 D1_NEO1.E@109.2,158.316 ; R1_NEO1.2@110.7,160.016 110.7,159.991 110.402,159.693 110.377,159.693 109.523,158.839 109.523,158.639 D1_NEO1.E@109.2,158.316 ; LM1_NEO1.1@112.275,156.656 110.74,156.656 110.7,156.616 110.7,156.641 110.377,156.964 110.352,156.964 109.523,157.793 109.523,157.993 D1_NEO1.E@109.2,158.316
PD-1_NEO2: D1_NEO2.E LM1_NEO2.1 R1_NEO2.2 | length 6.3
  Top Layer w0.254: D1_NEO2.E@99.716,157.217 D1_NEO2.E@99.765,157.227 ; R1_NEO2.2@100.904,159.187 100.909,159.162 100.675,158.812 100.65,158.807 99.98,157.803 100.019,157.607 D1_NEO2.E@99.765,157.227 ; LM1_NEO2.1@103.105,156.199 101.599,155.899 101.568,155.852 101.563,155.877 101.183,156.131 101.158,156.126 100.184,156.777 100.145,156.973 D1_NEO2.E@99.765,157.227
PD-1_NEO3: D1_NEO3.E LM1_NEO3.1 R1_NEO3.2 | length 6.3
  Top Layer w0.254: D1_NEO3.E@90.715,154.336 D1_NEO3.E@90.762,154.355 ; R1_NEO3.2@91.497,156.5 91.506,156.476 91.345,156.087 91.322,156.078 90.86,154.962 90.936,154.777 D1_NEO3.E@90.762,154.355 ; LM1_NEO3.1@94.238,153.998 92.82,153.411 92.798,153.358 92.788,153.381 92.366,153.556 92.343,153.547 91.26,153.995 91.184,154.18 D1_NEO3.E@90.762,154.355
PD-1_NEO4: D1_NEO4.E LM1_NEO4.1 R1_NEO4.2 | length 6.3
  Top Layer w0.254: D1_NEO4.E@82.413,149.659 D1_NEO4.E@82.454,149.686 ; R1_NEO4.2@82.757,151.933 82.771,151.913 82.689,151.499 82.668,151.485 82.432,150.301 82.543,150.134 D1_NEO4.E@82.454,149.686 ; LM1_NEO4.1@85.933,150.015 84.657,149.162 84.646,149.106 84.632,149.127 84.184,149.216 84.163,149.202 83.013,149.431 82.902,149.597 D1_NEO4.E@82.454,149.686
PD-1_NEO5: D1_NEO5.E LM1_NEO5.1 R1_NEO5.2 | length 6.3
  Top Layer w0.254: R1_NEO5.2@75.108,145.876 75.126,145.858 75.126,145.437 75.108,145.419 75.108,144.211 75.249,144.07 D1_NEO5.E@75.249,143.613 ; D1_NEO5.E@75.214,143.578 D1_NEO5.E@75.249,143.613 ; LM1_NEO5.1@78.598,144.614 77.512,143.528 77.512,143.472 77.494,143.49 77.038,143.49 77.02,143.472 75.848,143.472 75.706,143.613 D1_NEO5.E@75.249,143.613
PD-1_NEO6: D1_NEO6.E LM1_NEO6.1 R1_NEO6.2 | length 6.3
  Top Layer w0.254: R1_NEO6.2@68.788,138.339 68.809,138.325 68.891,137.912 68.877,137.891 69.112,136.706 69.279,136.595 D1_NEO6.E@69.368,136.147 ; D1_NEO6.E@69.34,136.105 D1_NEO6.E@69.368,136.147 ; LM1_NEO6.1@72.457,137.781 71.604,136.505 71.615,136.449 71.594,136.463 71.146,136.374 71.132,136.353 69.982,136.125 69.816,136.236 D1_NEO6.E@69.368,136.147
PD-1_NEO7: D1_NEO7.E LM1_NEO7.1 R1_NEO7.2 | length 6.3
  Top Layer w0.254: R1_NEO7.2@64.05,129.764 64.073,129.754 64.234,129.365 64.224,129.342 64.687,128.226 64.871,128.15 D1_NEO7.E@65.046,127.728 ; D1_NEO7.E@65.027,127.681 D1_NEO7.E@65.046,127.728 ; LM1_NEO7.1@67.757,129.933 67.169,128.515 67.191,128.463 67.168,128.472 66.746,128.298 66.736,128.274 65.653,127.826 65.468,127.902 D1_NEO7.E@65.046,127.728
PD-1_NEO8: D1_NEO8.E LM1_NEO8.1 R1_NEO8.2 | length 6.3
  Top Layer w0.254: R1_NEO8.2@61.057,120.449 61.082,120.444 61.316,120.094 61.311,120.069 61.982,119.065 62.178,119.026 D1_NEO8.E@62.432,118.646 ; D1_NEO8.E@62.422,118.597 D1_NEO8.E@62.432,118.646 ; LM1_NEO8.1@64.66,121.338 64.36,119.833 64.392,119.786 64.367,119.791 63.987,119.537 63.983,119.512 63.008,118.861 62.812,118.9 D1_NEO8.E@62.432,118.646
PD-1_NEO9: D1_NEO9.E LM1_NEO9.1 R1_NEO9.2 | length 6.3
  Top Layer w0.254: R1_NEO9.2@59.984,110.675 60.009,110.675 60.307,110.377 60.307,110.352 61.161,109.498 61.361,109.498 D1_NEO9.E@61.684,109.175 ; D1_NEO9.E@61.684,109.125 D1_NEO9.E@61.684,109.175 ; LM1_NEO9.1@63.344,112.25 63.344,110.715 63.384,110.675 63.359,110.675 63.036,110.352 63.036,110.327 62.207,109.498 62.007,109.498 D1_NEO9.E@61.684,109.175
PD-1_NEO10: D1_NEO10.E LM1_NEO10.1 R1_NEO10.2 | length 6.3
  Top Layer w0.254: R1_NEO10.2@60.813,100.904 60.838,100.909 61.188,100.675 61.193,100.651 62.197,99.98 62.394,100.019 D1_NEO10.E@62.773,99.765 ; D1_NEO10.E@62.783,99.716 D1_NEO10.E@62.773,99.765 ; LM1_NEO10.1@63.802,103.105 64.101,101.599 64.148,101.568 64.123,101.563 63.87,101.183 63.875,101.159 63.223,100.184 63.027,100.145 D1_NEO10.E@62.773,99.765
PD-1_NEO11: D1_NEO11.E LM1_NEO11.1 R1_NEO11.2 | length 6.3
  Top Layer w0.254: R1_NEO11.2@63.533,91.483 63.556,91.493 63.945,91.332 63.955,91.309 65.071,90.846 65.256,90.923 D1_NEO11.E@65.678,90.748 ; D1_NEO11.E@65.697,90.702 D1_NEO11.E@65.678,90.748 ; LM1_NEO11.1@66.034,94.224 66.622,92.806 66.674,92.784 66.651,92.775 66.476,92.353 66.486,92.33 66.037,91.247 65.852,91.17 D1_NEO11.E@65.678,90.748
PD-1_NEO12: D1_NEO12.E LM1_NEO12.1 R1_NEO12.2 | length 6.3
  Top Layer w0.254: R1_NEO12.2@68.004,82.781 68.024,82.795 68.438,82.712 68.452,82.692 69.636,82.456 69.802,82.567 D1_NEO12.E@70.25,82.478 ; LM1_NEO12.1@69.922,85.957 70.775,84.681 70.831,84.67 70.81,84.656 70.721,84.208 70.734,84.187 70.506,83.037 70.339,82.926 D1_NEO12.E@70.25,82.478 ; D1_NEO12.E@70.278,82.436 D1_NEO12.E@70.25,82.478
PD-1_NEO13: D1_NEO13.E LM1_NEO13.1 R1_NEO13.2 | length 6.3
  Top Layer w0.254: R1_NEO13.2@74.121,75.111 74.138,75.128 74.56,75.128 74.577,75.111 75.785,75.111 75.927,75.252 D1_NEO13.E@76.383,75.252 ; LM1_NEO13.1@75.383,78.6 76.468,77.515 76.525,77.515 76.507,77.497 76.507,77.04 76.525,77.023 76.525,75.85 76.383,75.709 D1_NEO13.E@76.383,75.252 ; D1_NEO13.E@76.419,75.217 D1_NEO13.E@76.383,75.252
PD-1_NEO14: D1_NEO14.E LM1_NEO14.1 R1_NEO14.2 | length 6.3
  Top Layer w0.254: R1_NEO14.2@81.617,68.781 81.631,68.802 82.044,68.884 82.065,68.87 83.249,69.106 83.36,69.272 D1_NEO14.E@83.808,69.361 ; LM1_NEO14.1@82.174,72.45 83.45,71.597 83.506,71.608 83.492,71.588 83.581,71.14 83.602,71.126 83.83,69.976 83.719,69.809 D1_NEO14.E@83.808,69.361 ; D1_NEO14.E@83.85,69.334 D1_NEO14.E@83.808,69.361
PD-1_NEO15: D1_NEO15.E LM1_NEO15.1 R1_NEO15.2 | length 6.3
  Top Layer w0.254: LM1_NEO15.1@90.034,67.743 91.452,67.156 91.505,67.177 91.495,67.154 91.67,66.732 91.693,66.723 92.142,65.639 92.065,65.455 D1_NEO15.E@92.24,65.033 ; R1_NEO15.2@90.203,64.036 90.213,64.059 90.602,64.22 90.625,64.211 91.741,64.673 91.818,64.858 D1_NEO15.E@92.24,65.033 ; D1_NEO15.E@92.286,65.013 D1_NEO15.E@92.24,65.033
PD-1_NEO16: D1_NEO16.E LM1_NEO16.1 R1_NEO16.2 | length 6.3
  Top Layer w0.254: LM1_NEO16.1@98.777,64.656 100.281,64.351 100.328,64.382 100.323,64.358 100.575,63.977 100.6,63.972 101.247,62.994 101.208,62.798 D1_NEO16.E@101.46,62.418 ; R1_NEO16.2@99.651,61.05 99.656,61.075 100.008,61.307 100.032,61.302 101.039,61.969 101.079,62.165 D1_NEO16.E@101.46,62.418 ; D1_NEO16.E@101.509,62.408 D1_NEO16.E@101.46,62.418
PD-1_NEO17: D1_NEO17.E LM1_NEO17.1 R1_NEO17.2 | length 6.3
  Top Layer w0.254: LM1_NEO17.1@107.725,63.319 109.26,63.319 109.3,63.359 109.3,63.334 109.623,63.011 109.648,63.011 110.477,62.182 110.477,61.982 D1_NEO17.E@110.8,61.659 ; R1_NEO17.2@109.3,59.959 109.3,59.984 109.598,60.282 109.623,60.282 110.477,61.136 110.477,61.336 D1_NEO17.E@110.8,61.659 ; D1_NEO17.E@110.85,61.659 D1_NEO17.E@110.8,61.659
PD-1_NEO18: D1_NEO18.E LM1_NEO18.1 R1_NEO18.2 | length 6.3
  Top Layer w0.254: LM1_NEO18.1@116.895,63.802 118.401,64.101 118.432,64.148 118.437,64.123 118.817,63.87 118.841,63.875 119.816,63.223 119.855,63.027 D1_NEO18.E@120.235,62.773 ; R1_NEO18.2@119.096,60.813 119.091,60.838 119.325,61.188 119.349,61.193 120.02,62.197 119.981,62.394 D1_NEO18.E@120.235,62.773 ; D1_NEO18.E@120.284,62.783 D1_NEO18.E@120.235,62.773
PD-1_NEO19: D1_NEO19.E LM1_NEO19.1 R1_NEO19.2 | length 6.3
  Top Layer w0.254: LM1_NEO19.1@125.799,66.044 127.217,66.631 127.239,66.684 127.248,66.661 127.67,66.486 127.693,66.495 128.776,66.047 128.853,65.862 D1_NEO19.E@129.275,65.687 ; R1_NEO19.2@128.54,63.542 128.53,63.566 128.691,63.955 128.715,63.965 129.177,65.08 129.1,65.265 D1_NEO19.E@129.275,65.687 ; D1_NEO19.E@129.321,65.706 D1_NEO19.E@129.275,65.687
PD-1_NEO20: D1_NEO20.E LM1_NEO20.1 R1_NEO20.2 | length 6.3
  Top Layer w0.254: LM1_NEO20.1@134.05,69.957 135.326,70.81 135.337,70.865 135.351,70.844 135.799,70.755 135.82,70.769 136.97,70.54 137.081,70.374 D1_NEO20.E@137.529,70.285 ; R1_NEO20.2@137.226,68.038 137.212,68.059 137.294,68.472 137.315,68.486 137.551,69.671 137.44,69.837 D1_NEO20.E@137.529,70.285 ; D1_NEO20.E@137.57,70.313 D1_NEO20.E@137.529,70.285
PD-1_NEO21: D1_NEO21.E LM1_NEO21.1 R1_NEO21.2 | length 6.3
  Top Layer w0.254: LM1_NEO21.1@141.4,75.418 142.485,76.504 142.485,76.56 142.503,76.543 142.96,76.543 142.977,76.56 144.15,76.56 144.291,76.419 D1_NEO21.E@144.748,76.419 ; D1_NEO21.E@144.783,76.454 D1_NEO21.E@144.748,76.419 ; R1_NEO21.2@144.889,74.156 144.872,74.174 144.872,74.595 144.889,74.613 144.889,75.821 144.748,75.962 D1_NEO21.E@144.748,76.419
PD-1_NEO22: D1_NEO22.E LM1_NEO22.1 R1_NEO22.2 | length 6.3
  Top Layer w0.254: LM1_NEO22.1@147.543,82.209 148.396,83.485 148.385,83.54 148.406,83.526 148.854,83.616 148.867,83.636 150.017,83.865 150.184,83.754 D1_NEO22.E@150.632,83.843 ; D1_NEO22.E@150.659,83.885 D1_NEO22.E@150.632,83.843 ; R1_NEO22.2@151.212,81.651 151.191,81.665 151.109,82.079 151.123,82.099 150.887,83.284 150.721,83.395 D1_NEO22.E@150.632,83.843
PD-1_NEO23: D1_NEO23.E LM1_NEO23.1 R1_NEO23.2 | length 6.3
  Top Layer w0.254: LM1_NEO23.1@152.243,90.067 152.831,91.485 152.809,91.537 152.832,91.528 153.254,91.702 153.264,91.726 154.347,92.174 154.532,92.098 D1_NEO23.E@154.954,92.272 ; D1_NEO23.E@154.973,92.319 D1_NEO23.E@154.954,92.272 ; R1_NEO23.2@155.95,90.236 155.927,90.246 155.766,90.635 155.776,90.658 155.313,91.774 155.129,91.85 D1_NEO23.E@154.954,92.272
PD-1_NEO24: D1_NEO24.E LM1_NEO24.1 R1_NEO24.2 | length 6.3
  Top Layer w0.254: LM1_NEO24.1@155.321,98.691 155.62,100.197 155.589,100.244 155.613,100.239 155.993,100.493 155.998,100.517 156.973,101.168 157.169,101.129 D1_NEO24.E@157.549,101.383 ; D1_NEO24.E@157.558,101.432 D1_NEO24.E@157.549,101.383 ; R1_NEO24.2@158.923,99.58 158.899,99.585 158.665,99.936 158.669,99.96 157.999,100.964 157.802,101.003 D1_NEO24.E@157.549,101.383
PD-1_NEO25: D1_NEO25.E LM1_NEO25.1 R1_NEO25.2 | length 6.3
  Top Layer w0.254: LM1_NEO25.1@156.656,107.75 156.656,109.285 156.616,109.325 156.641,109.325 156.964,109.648 156.964,109.673 157.793,110.502 157.993,110.502 D1_NEO25.E@158.316,110.825 ; D1_NEO25.E@158.316,110.875 D1_NEO25.E@158.316,110.825 ; R1_NEO25.2@160.016,109.325 159.991,109.325 159.693,109.623 159.693,109.648 158.839,110.502 158.639,110.502 D1_NEO25.E@158.316,110.825
PD-1_NEO26: D1_NEO26.E LM1_NEO26.1 R1_NEO26.2 | length 6.3
  Top Layer w0.254: LM1_NEO26.1@156.194,116.92 155.894,118.425 155.847,118.457 155.872,118.462 156.125,118.841 156.121,118.866 156.772,119.841 156.968,119.88 D1_NEO26.E@157.222,120.26 ; D1_NEO26.E@157.212,120.309 D1_NEO26.E@157.222,120.26 ; R1_NEO26.2@159.182,119.12 159.157,119.115 158.807,119.349 158.802,119.374 157.798,120.045 157.602,120.006 D1_NEO26.E@157.222,120.26
PD-1_NEO27: D1_NEO27.E LM1_NEO27.1 R1_NEO27.2 | length 6.3
  Top Layer w0.254: LM1_NEO27.1@153.906,125.724 153.318,127.142 153.266,127.164 153.289,127.173 153.464,127.595 153.455,127.618 153.903,128.702 154.088,128.778 D1_NEO27.E@154.263,129.2 ; D1_NEO27.E@154.244,129.246 D1_NEO27.E@154.263,129.2 ; R1_NEO27.2@156.407,128.465 156.384,128.455 155.995,128.617 155.985,128.64 154.87,129.102 154.685,129.025 D1_NEO27.E@154.263,129.2
PD-1_NEO28: D1_NEO28.E LM1_NEO28.1 R1_NEO28.2 | length 6.3
  Top Layer w0.254: D1_NEO28.E@149.687,137.57 D1_NEO28.E@149.715,137.529 ; LM1_NEO28.1@150.043,134.05 149.19,135.326 149.135,135.337 149.156,135.351 149.245,135.799 149.231,135.82 149.46,136.97 149.626,137.081 D1_NEO28.E@149.715,137.529 ; R1_NEO28.2@151.962,137.226 151.941,137.212 151.528,137.295 151.514,137.315 150.329,137.551 150.163,137.44 D1_NEO28.E@149.715,137.529
PD-1_NEO29: D1_NEO29.E LM1_NEO29.1 R1_NEO29.2 | length 6.3
  Top Layer w0.254: D1_NEO29.E@143.546,144.783 D1_NEO29.E@143.581,144.748 ; LM1_NEO29.1@144.582,141.4 143.496,142.485 143.44,142.485 143.457,142.503 143.457,142.96 143.44,142.977 143.44,144.15 143.581,144.291 D1_NEO29.E@143.581,144.748 ; R1_NEO29.2@145.844,144.889 145.826,144.872 145.405,144.872 145.387,144.889 144.179,144.889 144.038,144.748 D1_NEO29.E@143.581,144.748
PD-1_NEO30: D1_NEO30.E LM1_NEO30.1 R1_NEO30.2 | length 6.3
  Top Layer w0.254: D1_NEO30.E@136.15,150.666 D1_NEO30.E@136.192,150.639 ; LM1_NEO30.1@137.826,147.55 136.55,148.403 136.494,148.392 136.508,148.412 136.419,148.86 136.398,148.874 136.17,150.024 136.281,150.191 D1_NEO30.E@136.192,150.639 ; R1_NEO30.2@138.383,151.219 138.369,151.198 137.956,151.116 137.935,151.13 136.751,150.894 136.64,150.728 D1_NEO30.E@136.192,150.639
PD-1_NEO31: D1_NEO31.E LM1_NEO31.1 R1_NEO31.2 | length 6.3
  Top Layer w0.254: D1_NEO31.E@127.714,154.987 D1_NEO31.E@127.76,154.967 ; R1_NEO31.2@129.797,155.964 129.787,155.941 129.398,155.78 129.375,155.789 128.259,155.327 128.182,155.142 D1_NEO31.E@127.76,154.967 ; LM1_NEO31.1@129.966,152.257 128.548,152.844 128.495,152.823 128.505,152.846 128.33,153.268 128.307,153.277 127.858,154.361 127.935,154.545 D1_NEO31.E@127.76,154.967
PD-1_NEO32: D1_NEO32.E LM1_NEO32.1 R1_NEO32.2 | length 6.3
  Top Layer w0.254: D1_NEO32.E@118.597,157.578 D1_NEO32.E@118.646,157.568 ; R1_NEO32.2@120.449,158.943 120.444,158.918 120.094,158.684 120.069,158.689 119.065,158.018 119.026,157.822 D1_NEO32.E@118.646,157.568 ; LM1_NEO32.1@121.338,155.34 119.833,155.64 119.786,155.608 119.791,155.633 119.537,156.013 119.512,156.017 118.861,156.992 118.9,157.188 D1_NEO32.E@118.646,157.568
RX: JLINE.6 Teensy.15 | length 24.4
  Bottom Layer w0.4: Teensy.15@117.62,102.23 119.88,102.23 130.19,112.54 JLINE.6@137.75,112.54
SIDE1: PIN1.5 Teensy.11 | length 35
  Top Layer w0.254: PIN1.5@68,106.22 100.93,106.22 Teensy.11@102.38,104.77
SIDE2: PIN2.5 Teensy.5 | length 26.3
  Top Layer w0.254: Teensy.5@102.38,89.53 112.54,79.37 112.54,71.46 113.78,70.22 PIN2.5@113.78,68
SIDE3: PIN3.5 Teensy.41 | length 35
  Top Layer w0.254: Teensy.41@117.62,112.39 119.01,113.78 PIN3.5@152,113.78
TX: JLINE.1 Teensy.14 | length 32.6
  Bottom Layer w0.4: Teensy.14@117.62,104.77 119.47,104.77 129.7,115 143.4,115 JLINE.1@145.253,113.147
copper on no net:
  other v3: 110,53.25 53.25,110 166.75,110

## Polygon pours and split planes (outlines as drawn)
GND on Top Layer "GND_L01_P000" (solid, pour order 0): 47.5,165 172.5,165 172.5,47.5 47.5,47.5
GND on Bottom Layer "GND_L02_P001" (solid, pour order 1): 47.5,165 172.5,165 172.5,47.5 47.5,47.5

## Silkscreen, mask and mechanical layers (free items; w line width, h text height)
Top Overlay:
  drawing of 25 lines, arcs and shapes, not listed
  text "PD1" at 109.35,156.6 h0.5
  text "PD1" at 109.35,156.6 h0.5
  text "PD32" at 118.454,155.831 h0.5 r348.75
  text "PD2" at 100.271,155.578 h0.5 r11.25
  text "PD31" at 127.233,153.302 h0.5 r337.5
  text "PD3" at 91.566,152.804 h0.5 r22.5
  text "PD30" at 135.349,149.108 h0.5 r326.25
  text "PD4" at 83.57,148.385 h0.5 r33.75
  text "PD29" at 142.492,143.411 h0.5 r315
  text "PD5" at 76.589,142.492 h0.5 r45
  text "PD28" at 148.385,136.43 h0.5 r303.75
  text "PD6" at 70.892,135.349 h0.5 r56.25
  text "PD27" at 152.804,128.434 h0.5 r292.5
  text "PD7" at 66.698,127.233 h0.5 r67.5
  text "R4" at 101.15,122.9 h0.5 r180
  text "PD26" at 155.578,119.729 h0.5 r281.25
  text "PD8" at 64.169,118.454 h0.5 r78.75
  text "D" at 66.425,116.65 h0.5 r180
  text "5" at 153.275,116.125 h0.5
  text "3" at 66.425,114.075 h0.5 r180
  text "C" at 153.275,113.525 h0.5
  text "G" at 66.425,111.075 h0.5
  text "R" at 153.25,110.975 h0.5
  text "PD25" at 156.6,110.65 h0.5 r270
  text "PD9" at 63.4,109.35 h0.5 r90
  text "R" at 66.4,108.55 h0.5
  text "G" at 153.275,108.425 h0.5
  text "R2" at 101.15,107.65 h0.5 r180
  text "R3" at 119.65,107.65 h0.5 r180
  text "3" at 153.25,106.375 h0.5 r180
  text "C" at 66.4,106 h0.5
  text "D" at 153.275,103.85 h0.5 r180
  text "5" at 66.4,103.4 h0.5
  text "D" at 101.15,102.65 h0.5 r180
  text "PD24" at 155.831,101.546 h0.5 r258.75
  text "PD10" at 64.422,100.271 h0.5 r101.25
  text "PD23" at 153.302,92.767 h0.5 r247.5
  text "PD11" at 67.196,91.566 h0.5 r112.5
  text "R1" at 101.15,87.4 h0.5 r180
  text "PD22" at 149.108,84.651 h0.5 r236.25
  text "PD12" at 71.615,83.57 h0.5 r123.75
  text "3" at 119.15,79.65 h0.5 r180
  text "PD21" at 143.411,77.508 h0.5 r225
  text "G" at 119.15,76.9 h0.5 r180
  text "PD13" at 77.508,76.589 h0.5 r135
  text "G" at 101.15,74.65 h0.5 r180
  text "V" at 119.15,74.4 h0.5 r180
  text "PD20" at 136.43,71.615 h0.5 r213.75
  text "PD14" at 84.651,70.892 h0.5 r146.25
  text "PD19" at 128.434,67.196 h0.5 r202.5
  text "D" at 103.475,66.725 h0.5 r180
  text "PD15" at 92.767,66.698 h0.5 r157.5
  text "3" at 106,66.7 h0.5 r180
  text "G" at 108.5,66.225 h0.5
  text "R" at 111.1,66.225 h0.5
  text "C" at 113.575,66.225 h0.5
  text "5" at 116.15,66.225 h0.5
  text "PD18" at 119.729,64.422 h0.5 r191.25
  text "PD16" at 101.546,64.169 h0.5 r168.75
  text "PD17" at 110.65,63.4 h0.5 r180
Bottom Overlay:
  drawing of 6 lines, arcs and shapes, not listed
  text "D" at 66.4,116.65 h0.5 r180
  text "5" at 150.725,116.125 h0.5
  text "3" at 69.275,114.1 h0.5 r180
  text "C" at 153.6,113.525 h0.5
  text "R" at 134.7,112.3 h0.5
  text "T" at 147.7,112.25 h0.5
  text "G" at 66.4,111.575 h0.5 r180
  text "R" at 150.7,110.975 h0.5
  text "G" at 147.375,109.925 h0.5
  text "G" at 134.2,109.775 h0.5
  text "R" at 69.3,109.025 h0.5 r180
  text "G" at 153.6,108.425 h0.5
  text "5" at 147.7,107.2 h0.5
  text "V" at 134.55,107.15 h0.5
  text "C" at 66.4,106.475 h0.5 r180
  text "3" at 150.725,105.9 h0.5
  text "5" at 69.275,103.875 h0.5 r180
  text "D" at 153.6,103.35 h0.5
Mechanical 1:
  circle w0.013: c53.25,110 r1.5
  circle w0.013: c166.75,110 r1.5
  circle w0.013: c110,53.25 r1.5
  lines w0.013: 49.209,110 51.229,113.5 55.25,113.5 56.25,114.5 56.25,115.294 58.316,125.678 62.367,135.46 68.25,144.264 75.736,151.75 84.54,157.633 94.322,161.684 104.706,163.75 115.294,163.75 125.678,161.684 135.46,157.633 144.264,151.75 151.75,144.264 157.633,135.46 161.684,125.678 163.75,115.294 163.75,114.5 164.75,113.5 168.771,113.5 170.791,110 168.771,106.5 164.75,106.5 163.75,105.5 163.75,104.706 161.684,94.322 157.633,84.54 151.75,75.736 144.264,68.25 135.46,62.367 125.678,58.316 115.294,56.25 114.5,56.25 113.5,55.25 113.5,51.229 110,49.209 106.5,51.229 106.5,55.25 105.5,56.25 104.706,56.25 94.322,58.316 84.54,62.367 75.736,68.25 68.25,75.736 62.367,84.54 58.316,94.322 56.25,104.706 56.25,105.5 55.25,106.5 51.229,106.5 49.209,110 ; 68.317,96.308 71.229,89.277 76.017,82.111 82.111,76.017 89.277,71.229 96.308,68.317 100,70.784 100,96 96,100 70.784,100 68.317,96.308 ; 68.317,123.692 70.784,120 96,120 100,124 100,149.216 96.308,151.683 89.277,148.771 82.111,143.983 76.017,137.889 71.229,130.723 68.317,123.692 ; 120,70.784 123.692,68.317 130.723,71.229 137.889,76.017 143.983,82.111 148.771,89.277 151.683,96.308 149.216,100 124,100 120,96 120,70.784 ; 120,124 124,120 149.216,120 151.683,123.692 148.771,130.723 143.983,137.889 137.889,143.983 130.723,148.771 123.692,151.683 120,149.216 120,124